# Altium PCB Power_pcb.PcbDoc
Units mil, origin at the board's own origin, x right, y up, seen from the top; angles counter-clockwise.
Board outline 2170 x 1470 mil, 2 copper layers (Top Layer, Bottom Layer); 20 components, 38 nets, 47 pads, 1 vias.
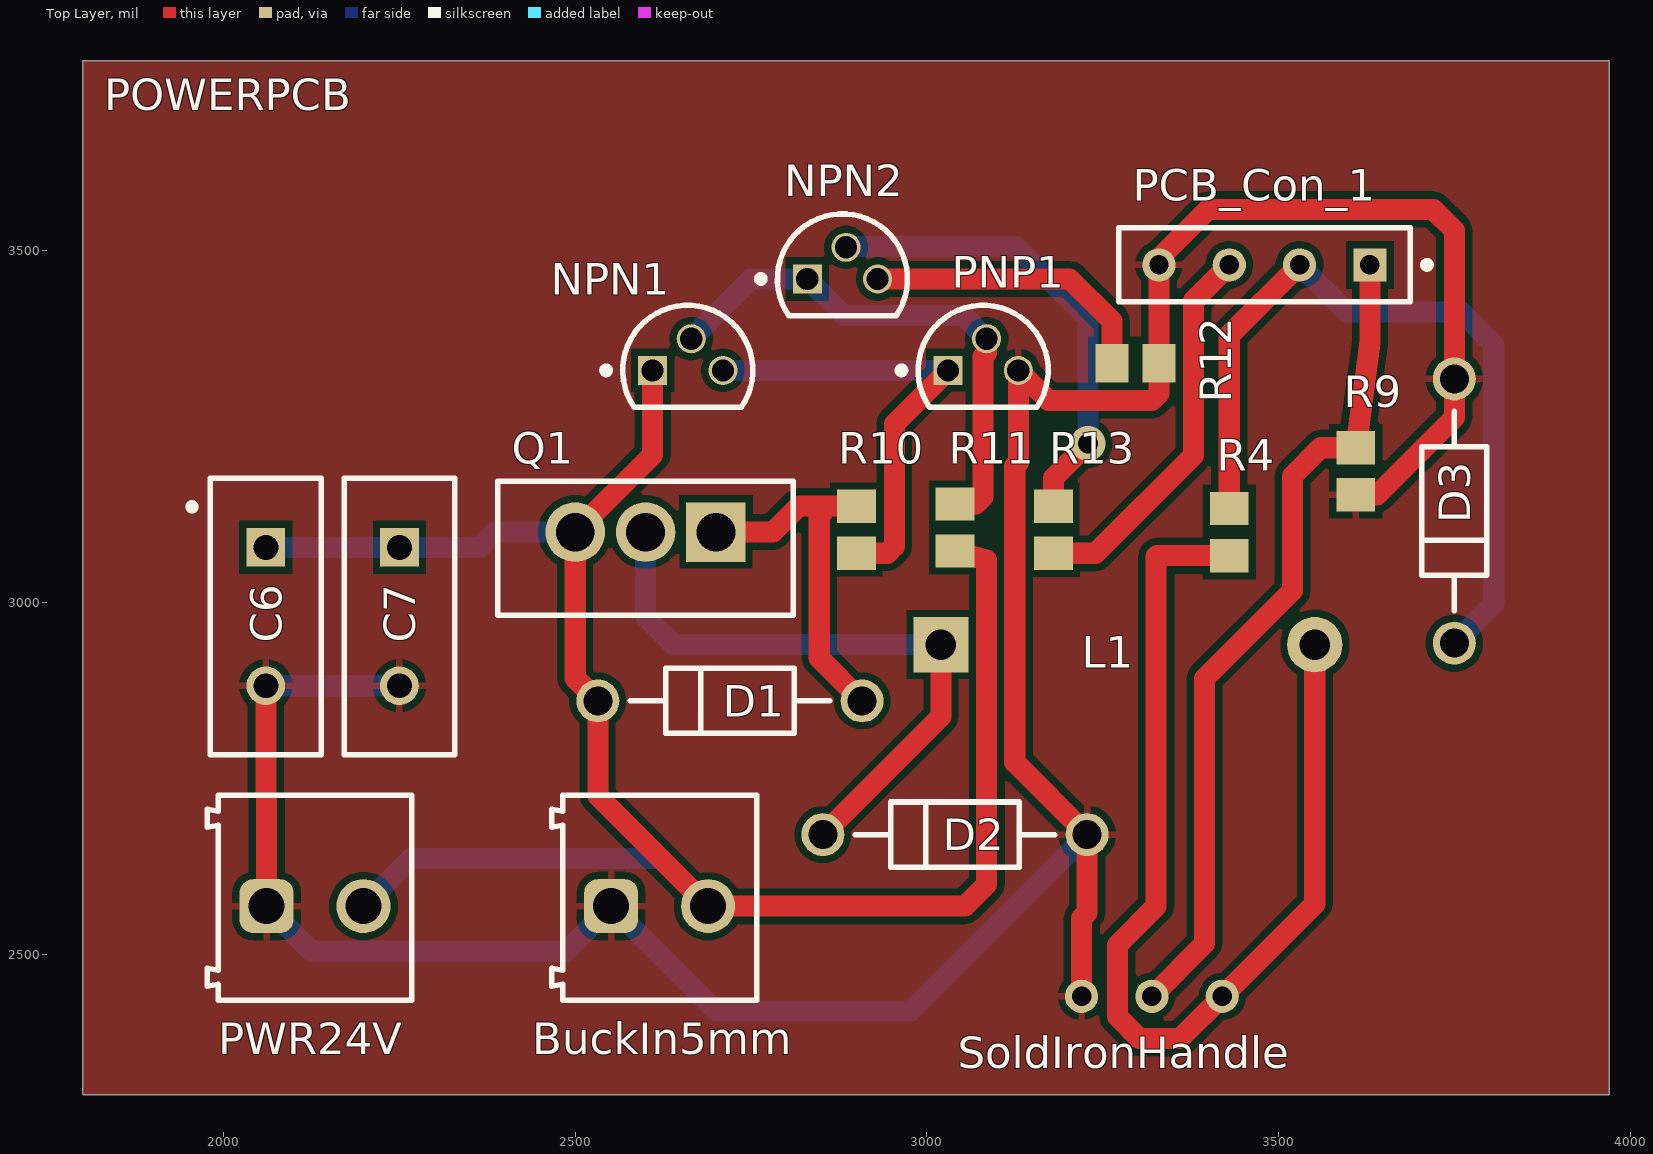
[diagram p0: Top Layer view]
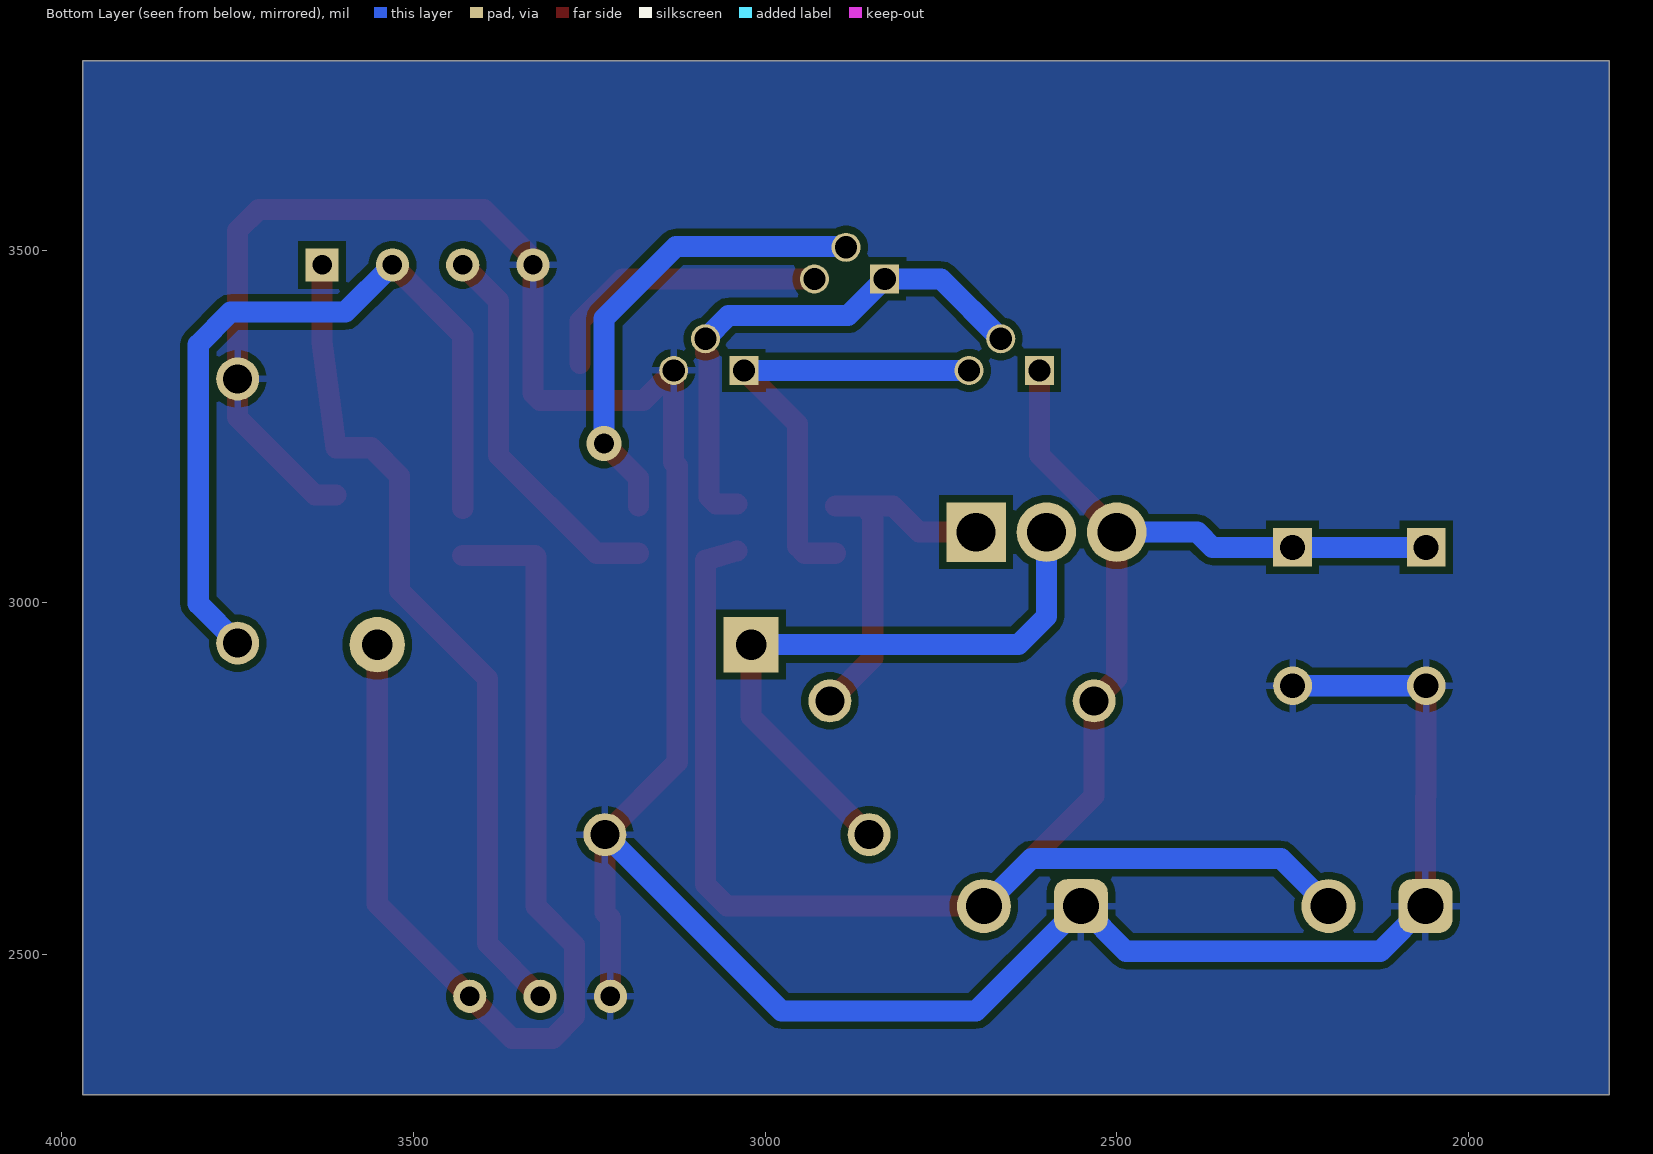
[diagram p1: Bottom Layer view, seen from below]

## Layer stack, top to bottom
Top Solder: solder mask 0.4, Solder Resist, Dk 3.5
Top Layer: signal copper 1.4
Dielectric 1: dielectric 12.6, FR-4, Dk 4.8
Bottom Layer: signal copper 1.4
Bottom Solder: solder mask 0.4, Solder Resist, Dk 3.5

## Board outline
1800,2300 3970,2300 3970,3770 1800,3770

## Design rules (kind name [scope] priority, off if disabled: settings)
Clearance [All] p1: gap=10 ignorepadtopadclearanceinfootprint=FALSE
PolygonConnect [All] p1: connectstyle=Relief reliefconductorwidth=10 reliefentries=4 polygonreliefangle="90 Angle" airgapwidth=10
RoutingVias [All] p1: holewidth=28 width=50 viastyle="Through Hole" minholewidth=28 minwidth=50 maxholewidth=28 maxwidth=50
SolderMaskExpansion [All] p1: expansion=4 istentingtop=FALSE
Width [All] p1: maxlimit=30 minlimit=10 preferedwidth=30 minimp=50.000000 maximp=50.000000 favimp=50.000000
30 further rules are at their usual default settings.

## Components (designator, comment, footprint, x,y, rotation, side; value= is the part's Value field where it differs from the comment)
BuckIn5mm "" screw_terminal 2620,2580 r0 top (schematic designator Buck_Conv_In_5mm_Con)
C6 "1000uF" Capacitor_Polarised 2060,2980 r270 top
C7 "100n" Capacitor_Monolitoc 2250,2980 r270 top
D1 "18V" Zener_Diode 2720,2860 r0 top
D2 "UF5408-E3/54" Zener_Diode 3040,2670 r0 top
D3 "3V" Zener_Diode 3750,3130 r90 top (schematic designator 3)
L1 "100µH" Coil 3020,2940 r0 top
NPN1 "P2N2222A" NPN_Transistor_2N2222A 2660,3330 r0 top
NPN2 "P2N2222A" NPN_Transistor_2N2222A 2880,3460 r0 top
PCB_Con_1 "" Header-Female-JST_4pin 3480,3480 r180 top
PNP1 "2N2907A" PNP_Transistor_2N2907A 3080,3330 r0 top
PWR24V "" screw_terminal 2130,2580 r0 top (schematic designator 5mm_connector_24V)
Q1 "IRF9540" Mosfet_IRF9540NPBF 2600,3077.07 r270 top
R4 "10K" Resistor 3430,3100 r90 top
R9 "0.1E 2W" Resistor 3610,3186.54 r90 top
R10 "100E" Resistor 2900,3103.46 r270 top
R11 "5.1K" Resistor 3040,3106.54 r90 top
R12 "1K" Resistor 3296.54,3340 r0 top
R13 "100E" Resistor 3180,3103.46 r90 top
SoldIronHandle "" 3Pin_Connector 3421,2440 r180 top (schematic designator Soldering_Iron_Handle_5mm_Term_Block)

## Footprints (in the part's own frame and the unit in brackets; to place one, negate y for a bottom-side part, rotate by r counter-clockwise, add the part's x,y. Pads: shape width x height; smd on the part's side, far side on the other; paste and mask are expansions set on the pad)
3Pin_Connector [mm]
  round 1.2 hole 0.7 paste-2539.97 mask+0: 1(0.025,0) 2(2.565,0) 3(5.105,0)
Capacitor_Monolitoc [mm]
  rect 1.4x1.4 hole 0.9: 1(-2.5,0)
  round 1.4 hole 0.9: 2(2.5,0)
  silkscreen extent -5,-2 5,2, body extent -5,-2 5,2, height 13
Capacitor_Polarised [mm]
  rect 1.4x1.4 hole 0.9: 1(-2.5,0)
  round 1.4 hole 0.9: 2(2.5,0)
  silkscreen extent -5,-2.78 5,2, body extent -5,-2 5,2, height 13
Coil [mm]
  rect 2x2 hole 1.1: 1(0,0)
  round 2 hole 1.1: 2(13.5,0)
Header-Female-JST_4pin [mm]
  rect 1.2x1.2 hole 0.7 paste-2539.97 mask+0: 1(-3.81,0)
  round 1.2 hole 0.7 paste-2539.97 mask+0: 2(-1.27,0) 3(1.27,0) 4(3.81,0)
  silkscreen extent -6,-1.34 5.27,1.34, body extent -5.37,-1.44 5.37,1.44, height 0.25
Mosfet_IRF9540NPBF [mm]
  rect 2.15x2.15 hole 1.4 paste-2539.97 mask+0: 1(-0.583,2.54)
  round 2.15 hole 1.4 paste-2539.97 mask+0: 2(-0.583,0) 3(-0.583,-2.54)
  silkscreen extent -2.42,-5.34 2.42,5.34, body extent -2.51,-5.44 2.51,5.44, height 0.25
NPN_Transistor_2N2222A [mm]
  rect 1.05x1.05 hole 0.8: 1(-1.27,0)
  round 1.05 hole 0.8: 2(0.127,1.143) 3(1.27,0)
  silkscreen extent -3.07,-1.34 2.35,2.35, body extent -2.35,-1.33 2.36,2.36, height 7.87
PNP_Transistor_2N2907A [mm]
  rect 1.05x1.05 hole 0.8: 1(-1.27,0)
  round 1.05 hole 0.8: 2(0.127,1.143) 3(1.27,0)
  silkscreen extent -3.07,-1.34 2.35,2.35, body extent -2.35,-1.33 2.36,2.36, height 7.87
Resistor [mm]
  rect 1.2x1.4 smd: 1(-0.85,0) 2(0.85,0)
  body extent -1.1,-0.7 1.1,0.7, height 0.5
screw_terminal [mm]
  rrect50% 1.95x1.95 hole 1.3: 1(-1.75,-0.3)
  round 1.95 hole 1.3: 2(1.75,-0.3)
  silkscreen extent -3.9,-3.7 3.5,3.7, body extent -3.95,-3.7 3.5,3.7, height 8.55
Zener_Diode [mm] "AXIAL, 2-Leads, Diameter 2.35mm"
  round 1.55 hole 1.05: 1(-4.77,0) 2(4.77,0)
  silkscreen extent -3.6,-1.18 3.6,1.18

## Part data
BuckIn5mm PWR24V: library part Screw_Terminal, Color="Blue, Green", Current=10A, Max Operating Temperature=105°C, Min Operating Temperature=-40°C, Voltage=300V, Contact Material=Brass, Contact Plating="Brass, Tin", Current Rating=10A, Height=8.7mm, Housing Material=Nylon, Lead Pitch=3.5mm, Length=7.4mm, Mount="Through Hole", NexarPartId=18818288, Number of Contacts=2, Number of Levels=1, Number of Pins=2, Number of Positions Per Level=2, Number of Rows=1, Packaging=Box, Pitch=3.5052mm, Plating="Brass, Steel", REACH SVHC=Unknown, RoHS=Compliant, Stripping Length=-6mm, Termination=Screw, Voltage Rating=300V, Width=7.9mm, Wire Gauge (Max)=24AWG, Wire Gauge (Min)=16AWG, Wire/Cable Gauge=24AWG
C6: library part Capacitor_Polarised, Capacity (elec.)=10nF, Manufacturer=Murata, Nominal voltage=1000V, Package Description="2-Pin Through Hole Device, Body 4 x 10 mm, Pitch 5 mm", Package Reference=DEBF33A103ZA2B, Tolerance=10%, Category=Ceramiccapacitor, Content=500pc(s), CS=5mm, Datasheet URL=http://psearch.en.murata.com/capacitor/product/DEBF33A103ZA2B.pdf, Datasheet Version=06/2016, Industrial packaging=Yes, Manufacturer URL=http://www.murata.com/, Material=Ceramic, Mounting Technology=ThroughHole, Packaging type=Bulk, Type=radiallead
C7: library part Capacitor_Monolitic, Capacity (elec.)=10nF, Manufacturer=Murata, Nominal voltage=1000V, Package Description="2-Pin Through Hole Device, Body 4 x 10 mm, Pitch 5 mm", Package Reference=DEBF33A103ZA2B, Tolerance=10%, Category=Ceramiccapacitor, Content=500pc(s), CS=5mm, Datasheet URL=http://psearch.en.murata.com/capacitor/product/DEBF33A103ZA2B.pdf, Datasheet Version=06/2016, Industrial packaging=Yes, Manufacturer URL=http://www.murata.com/, Material=Ceramic, Mounting Technology=ThroughHole, Packaging type=Bulk, Type=radiallead
D1 D3: library part Zener_Diode, Manufacturer="On Semiconductor", PartNumber=1N5931BRLG, ComponentLink1Description="Manufacturer URL", ComponentLink1URL=http://www.onsemi.com/, ComponentLink2Description=Datasheet, ComponentLink2URL=http://www.onsemi.cn/pub_link/Collateral/1N5913B-D.PDF, ComponentLink3Description="Package Specification", ComponentLink3URL=http://www.onsemi.cn/pub_link/Collateral/59-10.PDF, DatasheetVersion="Rev. 5", Mounting Technology="Through Hole", PackageDescription="2-Pin, Axial Lead, Diameter 2.35 mm", PackageReference=AXIAL_LEAD-2-59-10, PackageVersion="Rev. U, 02/2005", Packing="Tape and Reel", RoHS=Pb-Free, VZ Typ (V)=18
D2: library part Diode_UF5408, Average Rectified Current=3A, Capacitance=36pF, Case/Package=DO-201AD, Forward Voltage=1.7V, Max Forward Surge Current (Ifsm)=150A, Max Operating Temperature=150°C, Max Repetitive Reverse Voltage (Vrrm)=1kV, Max Reverse Current=10uA, Min Operating Temperature=-55°C, Package Quantity=1, Element Configuration=Single, Forward Current=3A, Height=5.3mm, Lead Free="Lead Free", Length=9.5mm, Max Reverse Voltage (DC)=1kV, Max Surge Current=150A, Mount="Through Hole", Number of Pins=2, Output Current=3A, Outside Diameter=5.3mm, Packaging="Tape and Reel", Peak Non-Repetitive Surge Current=150A, Polarity=Standard, Radiation Hardening=No, Recovery Time=75ns, Reverse Recovery Time=75ns, Reverse Recovery Time-Max=75ns, Reverse Voltage=1kV, RoHS Compliant=Yes, Series=-, Termination=Axial, Width=5.3mm
L1: library part 100µH_Inductor, Case/Package=Nonstandard, Current Rating=700mA, DC Resistance (DCR)=494mR, Inductance=100uH, Inductance Tolerance=20%, Max Operating Temperature=125°C, Min Operating Temperature=-40°C, Package Quantity=1000, Resistor Type=Wirewound, Saturation Current=800mA, Self Resonant Frequency=5MHz, Test Frequency=100kHz, Core Material=Ferrite, DC Current=700mA, Depth=6.2mm, Height=4.5mm, Height - Seated (Max)=0.177inch, Length=6mm, Material=Steel, Max DC Current=700mA, Military Standard=Not, Mount="Surface Mount", Number of Pins=2, Packaging="Tape and Reel", Radiation Hardening=No, REACH SVHC="No SVHC", RMS Current (Irms)=700mA, RoHS Compliant=Yes, Sample Rate (Hz)=100kHz, Series=SRN6045, Shielding=Shielded, Termination=SMD/SMT, Tolerance=20%, Weight=0.027725oz, Width=6mm
NPN1 NPN2: library part NPN_Transistor_2N2222A, Manufacturer="On Semiconductor", PartNumber=P2N2222AG, ComponentLink1Description="Manufacturer URL", ComponentLink1URL=http://www.onsemi.com/, ComponentLink2Description=Datasheet, ComponentLink2URL=http://www.onsemi.com/pub_link/Collateral/P2N2222A-D.PDF, ComponentLink3Description="Package Specification", ComponentLink3URL=http://www.onsemi.cn/pub_link/Collateral/2N6426-D.PDF, DatasheetVersion="Rev. 7", fT Min (MHz)=300, IC Continuous (A)=0.6, Mounting Technology="Through Hole", PackageDescription="3-Pin Transistor Outline, Body 4.825 x 3.685 mm, Pitch 1.27 mm", PackageReference=TO-92-3-29-11_AM_SL, PackageVersion="Rev. AM", Packing="Bulk Box", Polarity=NPN, RoHS=TRUE
PCB_Con_1: library part Header-Female-JST_4pin, Color=Black, Contact Resistance=10mR, Max Current Rating=1A, Max Operating Temperature=125°C, Min Operating Temperature=-55°C, Package Quantity=1, Connector Type=Receptacle, Contact Material=Copper, Contact Plating=Gold, Depth=2.54mm, Gender=Female, Housing Color=Black, Housing Material=Polyester, Lead Free="Lead Free", Length=10.16mm, Mount="Through Hole", Number of Contacts=4, Number of Positions=4, Number of Rows=1, Orientation=Straight, Packaging=Bulk, Pitch=2.54mm, Radiation Hardening=No, RoHS Compliant=Yes, Series=SS, Termination=Solder, Width=2.54mm
PNP1: library part PNP_Transistor_2N2907A, Manufacturer="On Semiconductor", PartNumber=MPSA92G, ComponentLink1Description="Manufacturer URL", ComponentLink1URL=http://www.onsemi.com/, ComponentLink2Description=Datasheet, ComponentLink2URL=http://www.onsemi.cn/pub_link/Collateral/MPSA92-D.PDF, ComponentLink3Description="Package Specification", ComponentLink3URL=http://www.onsemi.cn/pub_link/Collateral/2N6426-D.PDF, DatasheetVersion="Rev. 6", fT Min (MHz)=50, IC Continuous (A)=-0.5, Mounting Technology="Through Hole", PackageDescription="3-Pin Transistor Outline, Body 4.825 x 3.685 mm, Pitch 1.27 mm", PackageReference=TO-92-3-29-11_AM_SL, PackageVersion="Rev. AM", Packing="Bulk Box", Polarity=PNP, RoHS=TRUE
Q1: library part Mosfet_IRF9540NPBF, Case/Package=TO-262, Continuous Drain Current (ID)=23A, Drain to Source Resistance=117mR, Drain to Source Voltage (Vdss)=-100V, Gate to Source Voltage (Vgs)=20V, Input Capacitance=1.45nF, Max Operating Temperature=150°C, Max Power Dissipation=3.1W, Min Operating Temperature=-55°C, Power Dissipation=110W, Threshold Voltage=4V, Halogen Free="Not Halogen Free", Height=0.38inch, Lead Free="Contains Lead", Length=0.42inch, Max Dual Supply Voltage=-100V, Mount="Through Hole", Number of Channels=1, Number of Pins=3, Packaging=Rail/Tube, Rds On Max=117mR, REACH SVHC="No SVHC", Rise Time=67ns, RoHS Compliant=Yes, Turn-Off Delay Time=40ns, Turn-On Delay Time=13ns, Width=0.19inch
R4 R9 R10 R11 R12 R13: library part Resistor, Case/Package=Axial, Max Operating Temperature=175°C, Max Power Dissipation=250mW, Min Operating Temperature=-55°C, Power Rating=125mW, Resistance=73.2kΩ, Temperature Coefficient=50ppm/°C, Tolerance=1%, Voltage Rating=200V, Composition="Metal Film", Diameter=1.65mm, Features="Flame Retardant Coating, Moisture Resistant", Lead Free="Lead Free", Length=3.81mm, Mount="Through Hole", NexarPartId=44386654, Number of Terminations=2, Packaging="Cut Tape", RoHS=Compliant, Schedule B="8533210090, 8533210090|8533210090|8533210090|8533210090|8533210090", Termination=Axial, Voltage Rating (DC)=200V, Width=1.65mm
SoldIronHandle: library part 3Pin_Connector

## Via types
v1: diameter 50, hole 28, Top Layer to Bottom Layer, 1 vias

## Nets (pads, with @x,y where several pads share a name; then routed paths per layer and width w, separated by ;. In a path a pad name is that pad's centre, name@x,y a point inside that pad or via, vN(x,y) a via of type N, cw(c..) or ccw(c..) an arc to the next point about the centre after c; other vN are vias at no path point)
GND: BuckIn5mm.1 C6.2 C7.2 D2.2 D3.2 PCB_Con_1.4 PNP1.3 PWR24V.1 R9.1 R12.2 SoldIronHandle.3 | length 4154.2
  Top Layer w30: C6.2 2060,2725.1 2061.1,2724 PWR24V.1 ; SoldIronHandle.3 3220,2551 3227.8,2558.8 D2.2 3125,2772.8 3125,3194 3130,3199 PNP1.3 3173,3287 3320,3287 3330,3297 R12.2 3330,3410 PCB_Con_1.4 3330,3489 3400,3559 3720,3559 3750,3529 D3.2 3750,3263.07 3640,3153.07 R9.1
  Bottom Layer w30: C6.2 C7.2 ; PWR24V.1 2125.29,2504 2486.91,2504 BuckIn5mm.1 2700.29,2419 2976.8,2419 D2.2
Net3_1: D3.1 PCB_Con_1.2 R4.2 | length 1158.8
  Top Layer w30: R4.2 3430,3380 PCB_Con_1.2
  Bottom Layer w30: PCB_Con_1.2 3597,3413 3760,3413 3806,3367 3806,2998.2 D3.1
Net5mm_connector_24V_2: BuckIn5mm.2 C6.1 C7.1 D1.1 NPN1.1 PWR24V.2 Q1.3 R11.1 | length 2797.5
  Top Layer w30: NPN1.1 2610,3210 Q1.3 2500,2892.2 D1.1 2532.2,2724.88 BuckIn5mm.2 3054.19,2568.19 3085,2599 3085,3060 R11.1
  Bottom Layer w30: C6.1 C7.1 2364,3078.43 2385.57,3100 Q1.3 ; PWR24V.2 2266.71,2636 2621.09,2636 BuckIn5mm.2
Net*_5: 
Net*_6: 
Net*_7: 
Net*_8: 
Net*_9: 
Net*_10: 
Net*_11: 
Net*_13: 
Net*_15: 
Net*_16: 
Net*_17: 
Net*_18: 
Net*_21: 
NetBrightness_2: 
NetC1_1: 
NetC1_2: 
NetC2_2: 
NetC3_1: 
NetC4_1: 
NetC5_2: 
NetCalibration_1: 
NetCalibration_3: 
NetContrast_2: 
NetD1_2: D1.2 Q1.1 R10.1 | length 522.8
  Top Layer w30: Q1.1 2781,3100 2817.93,3136.93 2860,3136.93 ; R10.1 2860,3136.93 ; D1.2 2847,2920.8 2847,3123.93 2860,3136.93
NetD2_1: D2.1 L1.1 Q1.2 | length 896.1
  Top Layer w30: D2.1 3020,2837.8 L1.1
  Bottom Layer w30: Q1.2 2600,2980 2640,2940 L1.1
NetL1_2: L1.2 R4.1 SoldIronHandle.1 | length 1522.9
  Top Layer w30: R4.1 3327,3066.54 3326,3065.54 3326,2568 3271,2513 3271,2411 3302,2380 3360,2380 SoldIronHandle.1 3551.5,2571.5 L1.2
NetNPN1_2: NPN1.2 NPN2.1 PNP1.2 R11.2 | length 761.6
  Top Layer w30: R11.2 3070,3140 3080,3150 3080,3350 3085,3355 PNP1.2
  Bottom Layer w30: NPN1.2 2750,3460 NPN2.1 2882,3408 3052,3408 PNP1.2
NetNPN1_3: NPN1.3 PNP1.1 R10.2 | length 659.6
  Top Layer w30: R10.2 2944,3070 2954,3080 2954,3254 PNP1.1
  Bottom Layer w30: NPN1.3 PNP1.1
NetNPN2_2: NPN2.2 R13.2 | length 674.6
  Top Layer w30: R13.2 3180,3177 v1(3229,3226)
  Bottom Layer w30: NPN2.2 2885,3506 3127,3506 3229,3404 v1(3229,3226)
NetNPN2_3: NPN2.3 R12.1 | length 417.9
  Top Layer w30: NPN2.3 3203.07,3460 3263.07,3400 R12.1
NetPCB_Con_1_1: PCB_Con_1.1 R9.2 SoldIronHandle.2 | length 1190.7
  Top Layer w30: SoldIronHandle.2 3395,2515 3395,2892 3520,3017 3520,3180 3560,3220 R9.2 3630,3370 PCB_Con_1.1
NetPCB_Con_1_3: PCB_Con_1.3 R13.1 | length 548.7
  Top Layer w30: R13.1 3240,3070 3379,3209 3379,3429 PCB_Con_1.3
NetPCB_CON_2_1: 
NetPCB_CON_2_2: 
NetR1_2: 

## Polygon pours and split planes (outlines as drawn)
GND on Top Layer "GND_L01_P000" (solid, pour order 0): 1800,3770 3970,3770 3970,2300 1800,2300
GND on Bottom Layer "GND_L02_P001" (solid, pour order 1): 1800,3770 3970,3770 3970,2300 1800,2300

## Silkscreen, mask and mechanical layers (free items; w line width, h text height)
Top Overlay:
  text "POWERPCB" at 1830,3700 h45